# Altium PCB InactivityTracker.PcbDoc
Units mil, origin at the board's own origin, x right, y up, seen from the top; angles counter-clockwise.
Board outline 930 x 1725 mil, 2 copper layers (Top Layer, Bottom Layer); 67 components, 49 nets, 265 pads, 64 vias.
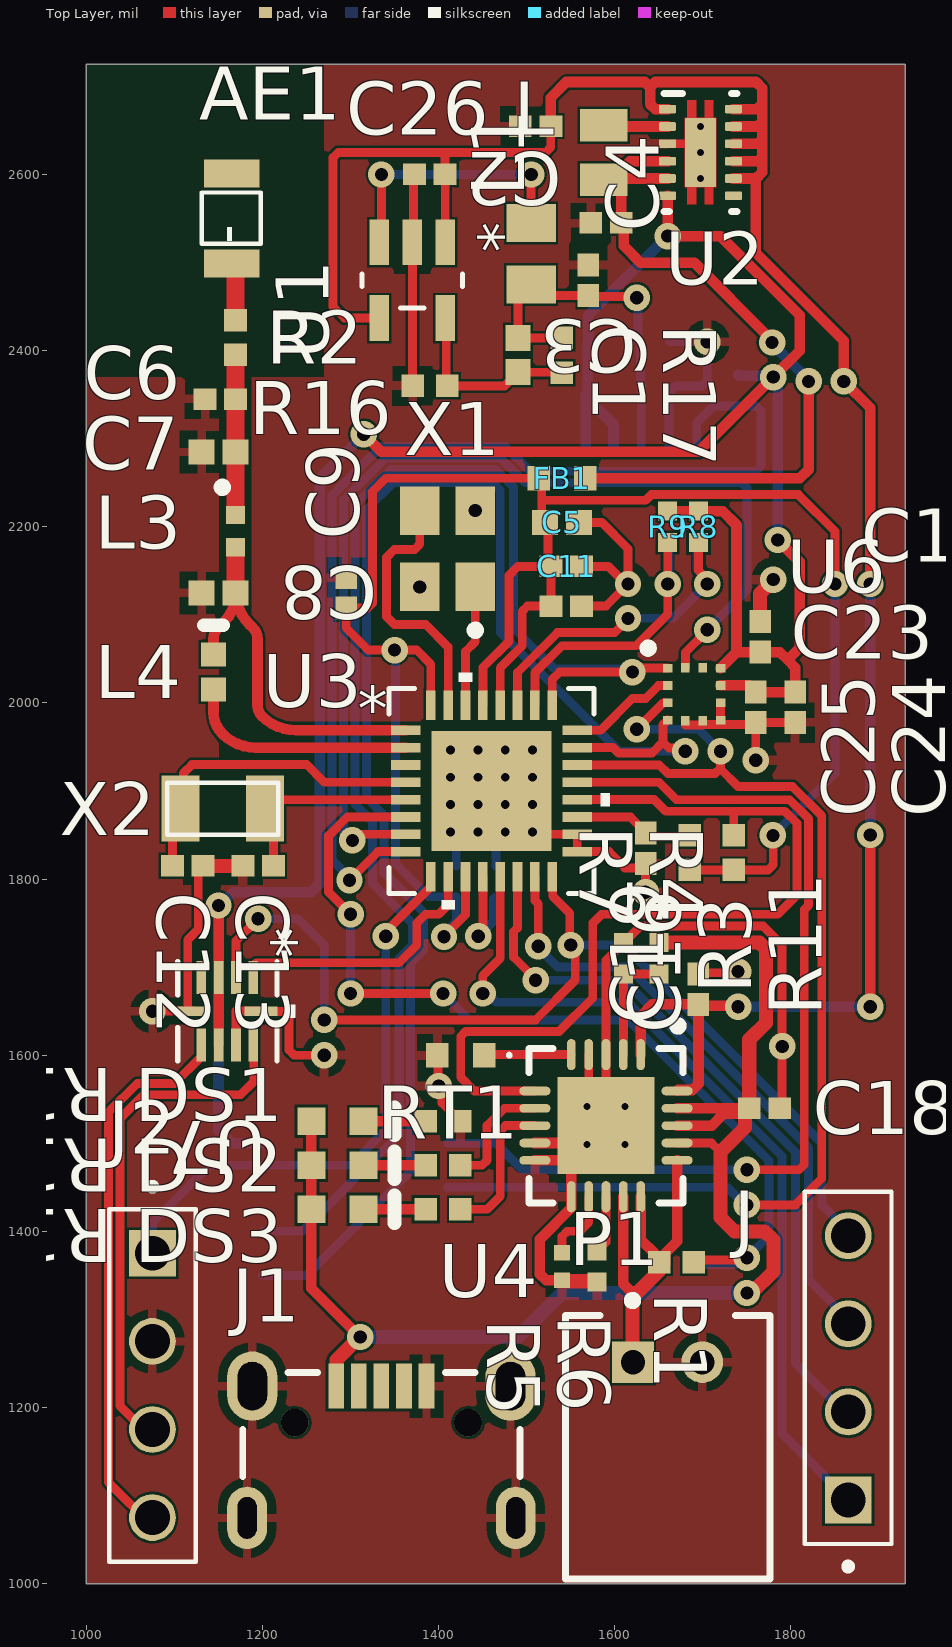
[diagram p0: Top Layer view]
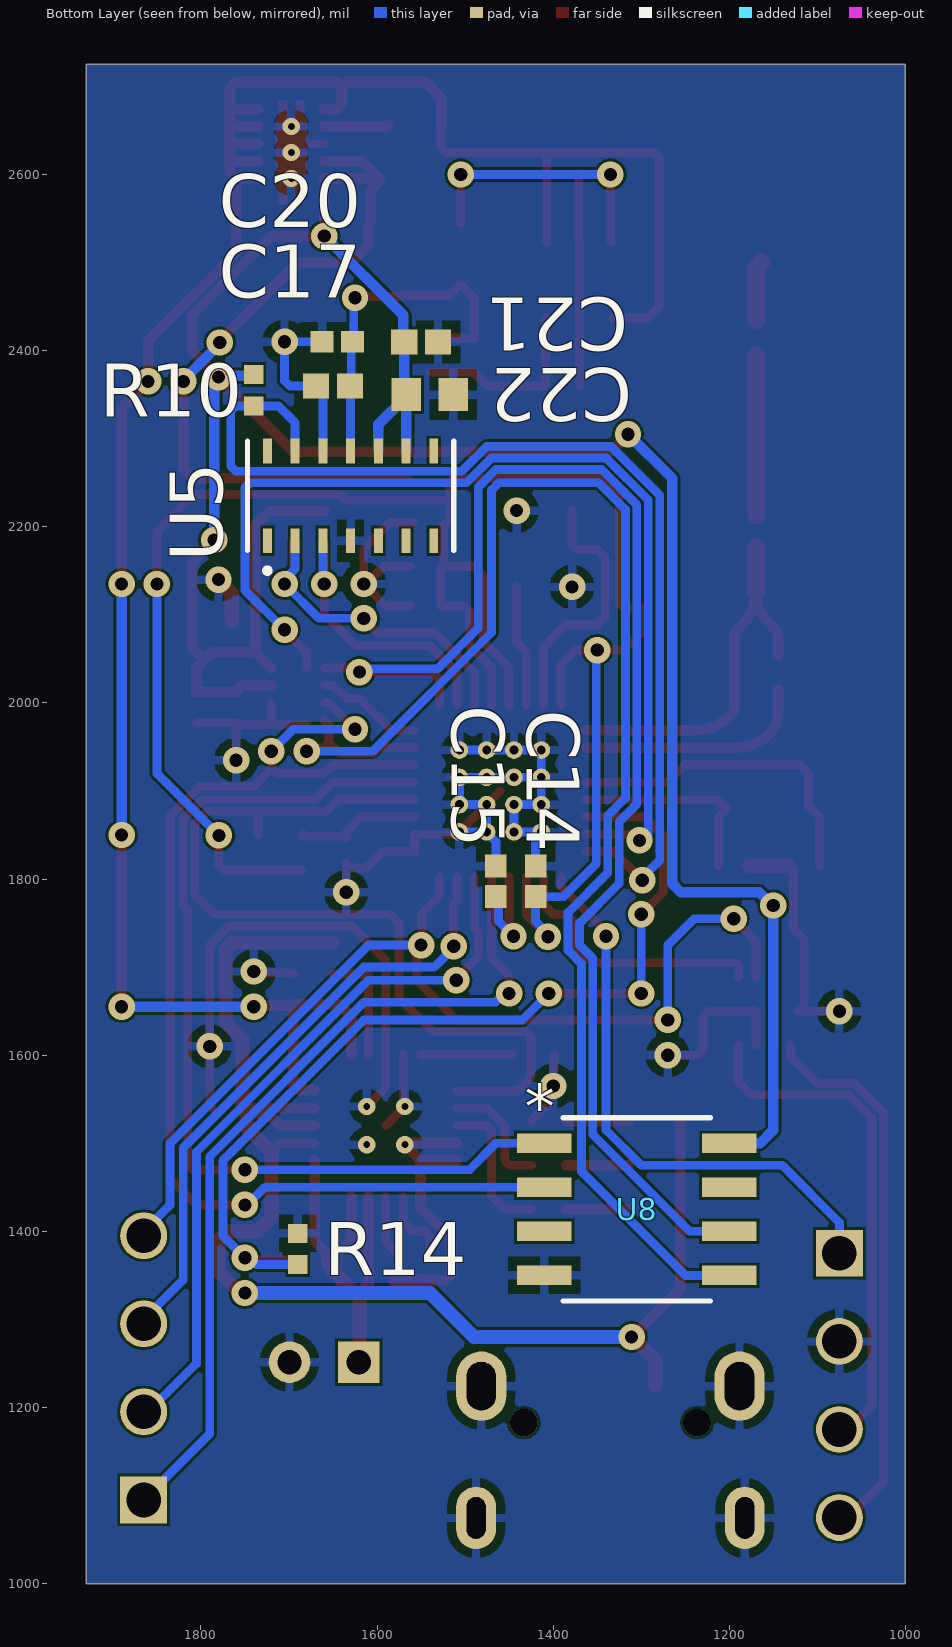
[diagram p1: Bottom Layer view, seen from below]

## Layer stack, top to bottom
Top Solder: solder mask 0.4, Solder Resist, Dk 3.5
Top Layer: signal copper 1.4
Dielectric 1: dielectric 12.6, FR-4, Dk 4.8
Bottom Layer: signal copper 1.4
Bottom Solder: solder mask 0.4, Solder Resist, Dk 3.5

## Board outline
1000,1000 1930,1000 1930,2725 1000,2725

## Design rules (kind name [scope] priority, off if disabled: settings)
Clearance [All] p1: gap=3 ignorepadtopadclearanceinfootprint=TRUE
PolygonConnect [All] p1: connectstyle=Relief reliefconductorwidth=10 reliefentries=4 polygonreliefangle="90 Angle" airgapwidth=10
RoutingVias [All] p1: holewidth=15 width=30 viastyle="Through Hole" minholewidth=5 minwidth=8 maxholewidth=28 maxwidth=50
SolderMaskExpansion [All] p1: expansion=4 istentingtop=FALSE
Width [All] p1: maxlimit=20 minlimit=3 preferedwidth=10
30 further rules are at their usual default settings.

## Classes and differential pairs
component class memory: U8

## Components (designator, comment, footprint, x,y, rotation, side; value= is the part's Value field where it differs from the comment)
AE1 "2450AT18B100E" ANT_2450AT18B100E 1165,2550 r90 top
C1 "100pF" CAPC1005X55X25ML05T10 1490,2395 r90 top
C2 "10uF" CAPC1005X55X25NL05T10 1510,2655 r180 top
C3 "10uF" CAPC1005X55X25NL05T10 1590,2545 r180 top
C4 "10uF" CAPC1005X55X25NL05T10 1570,2480 r90 top
C5 "2.2uF" CAPC1005X55X25ML05T10 1540,2205 r0 top
C6 "12pF" CAPC1005X55X25NL05T10 1152,2345 r180 top
C7 "1.2pF" CAPC1005X55X25ML05T10 1150,2285 r0 top
C8 "1.2pF" CAPC1005X55X25ML05T10 1150,2125 r0 top
C9 "100nF" CAPC1005X55X25NL05T10 1295,2125 r90 top
C10 "100nF" CAPC1005X55X25NL05T10 1545,2110 r180 top
C11 "100nF" CAPC1005X55X25NL05T10 1545,2155 r180 top
C12 "12pF" CAPC1005X55X25NL05T10 1115,1815 r180 top
C13 "12pF" CAPC1005X55X25NL05T10 1195,1815 r0 top
C14 "100nF" CAPC1005X55X25NL05T10 1420,1797.32 r270 bottom
C15 "1uF" CAPC1005X55X25NL5T10 1465,1797.32 r90 bottom
C16 "100nF" CAPC1005X55X25NL05T10 1635,1835 r90 top
C17 "0.1uF" CAPC1005X55X25ML05T10 1650,2360 r0 bottom
C18 "10uF" CAPC1005X55X25NL05T10 1770,1540 r0 top
C19 "4.7uF" CAPC1005X55X25NL05T10 1695,1675 r90 top
C20 "4.7uF" CAPC1005X55X25NL05T10 1645,2410 r0 bottom
C21 "0.1uF" CAPC1005X55X25ML05T10 1550,2410 r180 bottom
C22 "10uF" CAPC1608X90X35NL10T15 1540,2350 r180 bottom
C23 "100nF" CAPC1005X55X25NL05T10 1765,2075 r270 top
C24 "10uF" CAPC1005X55X25NL05T10 1805,1995 r270 top
C25 "100nF" CAPC1005X55X25NL05T10 1760,1995 r90 top
C26 "4.7uF" CAPC1005X55X25NL05T10 1390,2600 r180 top
DS1 "GREEN" LITE-ON-LTST-C190GKT-2_V 1285,1525 r0 top
DS2 "GREEN" LITE-ON-LTST-C190GKT-2_V 1285,1475 r0 top
DS3 "YELLOW" LITE-ON-LTST-C190GKT-2_V 1285,1425 r0 top
FB1 "BLM18HE152SN1D" MURA-BLM18-RF-H4-CHIP-2_V 1540,2255 r0 top
J "1987374-4" TE_1987374-4 1865,1095 r90 top
J1 "629105150521" 629105150521 1335,1110 r0 top
J2 "1987374-4" TE_1987374-4 1075,1375 r270 top
L "3.3uH" INDC2012X100N 1505,2510 r270 top
L1 "2.2uH" MURA-IND0805_H_0.55_L 1587.28,2625 r270 top
L3 "2nH" MURA-IND0402_V 1169.29,2195 r90 top
L4 "15nH" INDC1005X55X25ML05T10_A 1144.29,2035 r270 top
P1 "S2B-PH-K-S(LF)(SN)" JST-S2B-PH-K-S_V 1660,1155 r0 top
R1 "100K" RESC1005X40X25ML05T05 1670,1365 r0 top
R2 "0R" RESC1005X40X25ML05T05 1169.29,2415 r90 top
R3 "100k" RESC1005X40X25ML05T05 1685,1830 r270 top
R4 "330k" RESC1005X40X25NL05T05 1650,1710 r270 top
R5 "47k" RESC1005X40X25LL05T05 1540,1360 r270 top
R6 "88.7k" RESC1005X40X25NL05T05 1580,1360 r90 top
R7 "110k" RESC1005X40X25NL05T05 1610,1710 r90 top
R8 "1K" RESC1005X40X25NL05T05 1695,2200 r90 top
R9 "1K" RESC1005X40X25NL05T05 1660,2200 r90 top
R10 "1K" RESC1005X40X25NL05T05 1740,2355 r270 bottom
R11 "100k" RESC1005X40X25ML05T05 1735,1830 r270 top
R12 "470" RESC1005X40X25ML05T05 1405,1475 r0 top
R13 "470" RESC1005X40X25ML05T05 1405,1425 r0 top
R14 "249K" RESC1005X40X25NL05T05 1690,1380 r90 bottom
R15 "470" RESC1005X40X25ML05T05 1405,1525 r0 top
R16 "100k" RESC1005X40X25ML05T05 1390,2360 r0 top
R17 "200k" RESC1005X40X25ML05T05 1540,2394.68 r90 top
RT1 "10k" MURA-NCP18XH103F03RB-2_V 1425,1600 r180 top
U1 "SP6669AEK-L/TRR3" SOT-23-5_VAR-AA 1370,2480 r270 top value=Value
U2 "TPS62740DSSR" DSS0012A_V 1697.28,2625 r0 top
U3 "CC2640F128RHBT" RHB32_3P45X3P45 1460,1900 r0 top value=Value
U4 "MCP73871-2CCI/ML" QFN-ML20_M 1590,1520 r270 top
U5 "MAX30102EFD+" 21-0880B-L 1630,2235 r90 bottom
U6 "LIS2HH12TR" STM-LGA-12 1690,2010 r0 top
U7 "DRV2603RUNR" RUN10 1160,1650 r270 top value=Value
U8 "MX25R3235FM1IL0" SOP_8L_150 1305,1425 r180 bottom value=Value
X1 "24.0000Mhz" EPSON-TSX-3225_V 1410,2175 r90 top
X2 "32.768kHz" XTAL320X150X75 1155,1880 r0 top

## Footprints (in the part's own frame and the unit in brackets; to place one, negate y for a bottom-side part, rotate by r counter-clockwise, add the part's x,y. Pads: shape width x height; smd on the part's side, far side on the other; paste and mask are expansions set on the pad)
21-0880B-L [mil]
  rect 28x10 smd paste+0 mask+0: 1(-51,94.49) 2(-51,62.99) 3(-51,31.5) 4(-51,0) 5(-51,-31.5) 6(-51,-62.99) 7(-51,-94.49) 8(51,-94.49) 9(51,-62.99) 10(51,-31.5) 11(51,0) 12(51,31.5) 13(51,62.99) 14(51,94.49)
  silkscreen extent -88,-117 62,117, body extent -57,-112 57,112, height 51
629105150521 [mm] "Micro USB 2.0 SMT Type B Horizontal 5 Contacts High Current"
  rect 0.45x1.3 smd: 1(-1.3,2.9) 2(-0.65,2.9) 3(0,2.9) 4(0.65,2.9) 5(1.3,2.9)
  round 0.8 hole 0.8 unplated: MH1(-2.5,1.85) MH2(2.5,1.85)
  oval 1.15x1.8 hole 0.55 slot 1.2 at 90 deg: Shell(-3.875,-0.9) Shell(3.875,-0.9)
  oval 1.45x2 hole 0.85 slot 1.4 at 90 deg: Shell(-3.725,2.9) Shell(3.725,2.9)
  silkscreen extent -4,0.3 4,3.3, body extent -4,-3.3 4,3.3, height 2.75
ANT_2450AT18B100E [mm]
  rect 0.8x1.6 smd: 1(-1.3,0) 2(1.3,0)
  silkscreen extent -0.73,-0.84 0.75,0.86, body extent -1.6,-0.7 1.6,0.7, height 0.8
CAPC1005X55X25ML05T10 [mm] "Chip Capacitor, 2-Leads, Body 1.00x0.50mm, IPC Low Density"
  rect 0.76x0.72 smd: 1(-0.49,0) 2(0.49,0)
  body extent -0.53,-0.28 0.53,0.27, height 0.55
CAPC1005X55X25NL05T10 [mm] "Chip Capacitor, 2-Leads, Body 1.00x0.50mm, IPC Medium Density"
  rect 0.66x0.62 smd: 1(-0.44,0) 2(0.44,0)
  body extent -0.53,-0.28 0.53,0.27, height 0.55
CAPC1005X55X25NL5T10 [mm] "Chip Capacitor, 2-Leads, Body 1.05x0.55mm, IPC Medium Density"
  rect 0.66x0.62 smd: 1(-0.44,0) 2(0.44,0)
  body extent -0.52,-0.28 0.53,0.27, height 0.55
CAPC1608X90X35NL10T15 [mm] "Chip Capacitor, 2-Leads, Body 1.60x0.80mm, IPC Medium Density"
  rect 0.85x0.95 smd: 1(-0.675,0) 2(0.675,0)
  body extent -0.85,-0.45 0.85,0.45, height 0.9
DSS0012A_V [mm] "SON, 12-Leads, Body 2x3mm, Pitch 0.5mm, Thermal Pad 2x0.9mm, TI Recommended"
  rrect40% 0.5x0.25 smd: 1(-0.95,1.25) 2(-0.95,0.75) 3(-0.95,0.25) 4(-0.95,-0.25) 5(-0.95,-0.75) 6(-0.95,-1.25) 7(0.95,-1.25) 8(0.95,-0.75) 9(0.95,-0.25) 10(0.95,0.25) 11(0.95,0.75) 12(0.95,1.25)
  rrect11% 0.9x2 smd paste-0.45: 13(0,0)
  Top Layer region: -0.375,-1.5 -0.375,-1 -0.45,-1 -0.45,1 -0.375,1 -0.375,1.5 -0.125,1.5 -0.125,1 0.125,1 0.125,1.5 0.375,1.5 0.375,1 0.45,1 0.45,-1 0.375,-1 0.375,-1.5 0.125,-1.5 0.125,-1 -0.125,-1 -0.125,-1.5
  silkscreen extent -1.05,-1.7 1.05,1.7, body extent -1,-1.5 1,1.5, height 0.8
EPSON-TSX-3225_V [mm] "SMD, 4-Leads, Body 3.2x2.5mm"
  rect 1.4x1.15 smd: 1(-1.1,-0.8) 2(1.1,-0.8) 3(1.1,0.8) 4(-1.1,0.8)
  silkscreen extent -2.47,-0.93 -2.23,-0.68, body extent -1.6,-1.25 1.6,1.25, height 0.6
INDC1005X55X25ML05T10_A [mm] "Chip Inductor, 2-Leads, Body 1.05x0.55mm, IPC Low Density"
  rect 0.69x0.72 smd: 1(-0.505,0) 2(0.505,0)
  silkscreen extent -1.35,-0.28 -1.35,0.28, body extent -0.52,-0.28 0.53,0.28, height 0.55
INDC2012X100N [mm]
  rect 1.1x1.42 smd: 1(-0.885,0) 2(0.885,0)
JST-S2B-PH-K-S_V [mm] "THD, 2-Leads, Body 7.6x5.9mm, Pitch 2mm"
  rect 1.2x1.2 hole 0.7: 1(-1,2.45)
  round 1.2 hole 0.7: 2(1,2.45)
  silkscreen extent -2.95,-3.8 2.95,4.35, body extent -2.95,-3.8 2.95,3.8, height 4.8
LITE-ON-LTST-C190GKT-2_V [mm] "Chip, 2-Leads, Body 1.6x0.8mm"
  rect 0.8x0.8 smd: 1(-0.75,0) 2(0.75,0)
  silkscreen extent 1.65,-0.4 1.65,0.4, body extent -0.8,-0.4 0.8,0.4, height 0.8
MURA-BLM18-RF-H4-CHIP-2_V [mm] "Chip Ferrite Bead, 2-Leads, Body 1.6x0.8mm, Height 0.95mm, Reflow"
  rect 0.65x0.7 smd: 1(-0.675,0) 2(0.675,0)
  body extent -0.8,-0.4 0.8,0.4, height 0.95
MURA-IND0402_V [mm] "SMT Inductor, 2 Leads, Body 1x0.5 mm"
  rect 0.525x0.55 smd: 1(0.463,0) 2(-0.462,0)
  silkscreen extent 1.14,0.26 1.39,0.51, body extent -0.5,-0.25 0.5,0.25, height 0.55
MURA-IND0805_H_0.55_L [mm] "Chip Inductor, 2-Leads, Body 2.2x1.45mm, IPC High Density"
  rect 0.93x1.37 smd: 1(-0.785,0) 2(0.785,0)
  body extent -1.1,-0.72 1.1,0.72, height 0.55
MURA-NCP18XH103F03RB-2_V [mm] "Chip, 2-Leads, Body 1.6x0.8mm"
  rect 0.65x0.7 smd: 1(-0.675,0) 2(0.675,0)
  silkscreen extent -1.45,-0.05 -1.35,0.05, body extent -0.8,-0.4 0.8,0.4, height 0.8
QFN-ML20_M [mm] "QFN, 20-Leads, Body 4x4mm, Pitch 0.5mm, Thermal Pad 2.8x2.8mm, IPC Low Density"
  oval 0.9x0.25 smd: 1(-2.05,1) 2(-2.05,0.5) 3(-2.05,0) 4(-2.05,-0.5) 5(-2.05,-1) 11(2.05,-1) 12(2.05,-0.5) 13(2.05,0) 14(2.05,0.5) 15(2.05,1)
  oval 0.25x0.9 smd: 6(-1,-2.05) 7(-0.5,-2.05) 8(0,-2.05) 9(0.5,-2.05) 10(1,-2.05) 16(1,2.05) 17(0.5,2.05) 18(0,2.05) 19(-0.5,2.05) 20(-1,2.05)
  rect 2.8x2.8 smd: 21(0,0)
  silkscreen extent -3,-2.22 2.23,2.23, body extent -2.07,-2.07 2.08,2.08, height 1
RESC1005X40X25LL05T05 [mm] "Chip Resistor, 2-Leads, Body 1.00x0.50mm, IPC High Density"
  rect 0.45x0.45 smd: 1(-0.4,0) 2(0.4,0)
  body extent -0.53,-0.27 0.53,0.28, height 0.4
RESC1005X40X25ML05T05 [mm] "Chip Resistor, 2-Leads, Body 1.05x0.55mm, IPC Low Density"
  rect 0.65x0.65 smd: 1(-0.5,0) 2(0.5,0)
  body extent -0.53,-0.28 0.53,0.28, height 0.4
RESC1005X40X25NL05T05 [mm] "Chip Resistor, 2-Leads, Body 1.00x0.50mm, IPC Medium Density"
  rect 0.55x0.55 smd: 1(-0.45,0) 2(0.45,0)
  body extent -0.53,-0.27 0.53,0.28, height 0.4
RHB32_3P45X3P45 [mm]
  rect 0.85x0.28 smd paste-0.14 mask+0: 1(-2.475,1.75) 2(-2.475,1.25) 3(-2.475,0.75) 4(-2.475,0.25) 5(-2.475,-0.25) 6(-2.475,-0.75) 7(-2.475,-1.25) 8(-2.475,-1.75) 17(2.475,-1.75) 18(2.475,-1.25) 19(2.475,-0.75) 20(2.475,-0.25) 21(2.475,0.25) 22(2.475,0.75) 23(2.475,1.25) 24(2.475,1.75)
  rect 0.28x0.85 smd paste-0.14 mask+0: 9(-1.75,-2.475) 10(-1.25,-2.475) 11(-0.75,-2.475) 12(-0.25,-2.475) 13(0.25,-2.475) 14(0.75,-2.475) 15(1.25,-2.475) 16(1.75,-2.475) 25(1.75,2.475) 26(1.25,2.475) 27(0.75,2.475) 28(0.25,2.475) 29(-0.25,2.475) 30(-0.75,2.475) 31(-1.25,2.475) 32(-1.75,2.475)
  rect 3.45x3.45 smd paste-1.712 mask-1.714: 33(0,0)
  round 0.508 hole 0.254: V(-1.181,-1.181) V(-1.181,-0.394) V(-1.181,0.394) V(-1.181,1.181) V(-0.394,-1.181) V(-0.394,-0.394) V(-0.394,0.394) V(-0.394,1.181) V(0.394,-1.181) V(0.394,-0.394) V(0.394,0.394) V(0.394,1.181) V(1.181,-1.181) V(1.181,-0.394) V(1.181,0.394) V(1.181,1.181)
  silkscreen extent -2.96,-3.41 3.41,3.41, body extent -2.63,-2.63 2.63,2.63, height 1.4
RUN10 [mm]
  rect 0.95x0.28 smd paste-0.14: 1(-0.975,0.75) 2(-0.975,0.25) 3(-0.975,-0.25) 4(-0.975,-0.75) 6(0.975,-0.75) 7(0.975,-0.25) 8(0.975,0.25) 9(0.975,0.75)
  rect 0.28x0.95 smd paste-0.14: 5(0,-0.975) 10(0,0.975)
  silkscreen extent -1.43,-1.43 1.43,1.96, body extent -1.1,-1.1 1.1,1.1, height 0.6
SOP_8L_150 [mil]
  rect 62x22 smd paste+0 mask+0: 1(-105,75) 2(-105,25) 3(-105,-25) 4(-105,-75) 5(105,-75) 6(105,-25) 7(105,25) 8(105,75)
  silkscreen extent -84,-104 84,104, body extent 0,0 10,10, height 10
SOT-23-5_VAR-AA [mil]
  rect 52x22 smd mask+0: 1(-43,37.4) 2(-43,0) 3(-43,-37.4) 4(43,-37.4) 5(43,37.4)
  silkscreen extent -7,-57 32,57, body extent 0,0 10,10, height 10
STM-LGA-12 [mm] "LGA, 12-Leads, Body 2x2mm, Pitch 0.5mm"
  rect 0.275x0.25 smd: 1(-0.763,0.75) 2(-0.763,0.25) 3(-0.763,-0.25) 4(-0.763,-0.75) 7(0.763,-0.75) 8(0.763,-0.25) 9(0.763,0.25) 10(0.763,0.75)
  rect 0.25x0.275 smd: 5(-0.25,-0.762) 6(0.25,-0.762) 11(0.25,0.763) 12(-0.25,0.763)
  silkscreen extent -1.45,1.2 -1.2,1.45, body extent -1,-1 1,1, height 1
TE_1987374-4 [mm]
  rect 1.35x1.35 hole 1: 1(0,0)
  round 1.35 hole 1: 2(2.54,0) 3(5.08,0) 4(7.62,0)
  silkscreen extent -2.02,-1.25 8.89,1.25
XTAL320X150X75 [mil]
  rect 43x75 smd: 1(-48,0) 2(48,0)
  silkscreen extent -63,-30 63,30

## Part data
AE1: "JOHANSON TECHNOLOGY - 2450AT18B100E - ANTENNA, CERAMIC, 2.45GHZ", Case/Package=CSMD, Frequency=2.45GHz, Manufacturer=Johanson, Max Frequency=2.5GHz, Max Operating Temperature=85°C, Max Power Dissipation=3W, Min Operating Temperature=-40°C, Package Quantity=1, Supplier Part Number 1=712-1006-1-ND, Bandwidth=100MHz, Category="RF Antennas", ComponentLink1Description=https://datasheet.ciiva.com/24025/antenna-2450at18b100-242422-24025839.pdf?src-supplier=Mouser, ComponentLink1URL=https://datasheet.ciiva.com/24025/antenna-2450at18b100-242422-24025839.pdf?src-supplier=Mouser, ComponentLink2Description=https://datasheet.ciiva.com/1124/1318299-1124918.pdf?src-supplier=Element14, ComponentLink2URL=https://datasheet.ciiva.com/1124/1318299-1124918.pdf?src-supplier=Element14, Contact Plating=Tin, Gain=-0.5dB, Height=0.051inch, Impedance=50R, Length=3.2mm, Manufacturer Part Number=2450AT18B100E, Mount="Surface Mount", Number of Bands=1, Packaging="Tape and Reel", Power Rating=3W, Pricing 1="1=0.56000, 10=0.49500, 25=0.46520, 100=0.37950, 250=0.35252, 500=0.30000, 1000=0.24000 (USD)", Radiation Hardening=No, REACH SVHC="No SVHC", Return Loss=-9.5dB, RoHS=Yes, Stock 1=218439, Supplier 1=Digi-Key, Termination=Solder, Width=1.6mm
C1: library part CMP-2008-04249-1, Manufacturer=Murata, Part Number=GRM1555C1H101GA01D
C2 C3 C4 C18 C24: library part CMP-2008-04556-1, Manufacturer=Murata, Part Number=GRM155R61A105KE15D
C5: library part CMP-2008-04543-1, Manufacturer=Murata, Part Number=GRM155R60J225ME15D
C6 C12 C13: library part CMP-2008-04258-1, Manufacturer=Murata, Part Number=GRM1555C1H120JA01D
C7 C8: library part CMP-2008-04281-1, Manufacturer=Murata, Part Number=GRM1555C1H1R2CA01D
C9 C10 C11 C14 C16 C23 C25: library part CMP-2008-04639-1, Manufacturer=Murata, Part Number=GRM155R71H104KE14D
C15: library part CMP-1662-00020-1, "Chip Capacitor, 1 uF, +/- 10%, 6.3 V, -55 to 85 degC, 0402 (1005 Metric), RoHS, Tape and Reel", Capacitance="1 uF", Case Code (Imperial)=0402, Case Code (Metric)=1005, Max Operating Temperature="85 degC", Min Operating Temperature="-55 degC", Package Quantity=10000, PartNumber=GRM155R60J105KE19D, Tolerance=10%, Type (Capacitors)=X5R, Voltage Rating="6.3 V", Voltage Rating (DC)="3 V", Case/Package=0402, ComponentLink1Description="Manufacturer URL", ComponentLink1URL=http://www.murata.com/, ComponentLink2Description=Datasheet, ComponentLink2URL=http://psearch.en.murata.com/capacitor/product/GRM155R60J105KE19%23.pdf, DatasheetVersion=08/2016, Height="0.5 mm", Length="1 mm", Mount="Surface Mount", Mounting Technology="Surface Mount", PackageDescription="2-Pin Surface Mount Device, Body 1 x 0.5 mm", Packaging="Tape and Reel", Pins=2, Radiation Hardening=No, REACH SVHC="No SVHC", RoHSCompliant=true, Width="0.5 mm"
C17 C21: library part CMP-2100-03641-1, "Chip Capacitor, 0.1 uF, +/- 10%, 16 V, -55 to 125 degC, 0402 (1005 Metric), RoHS, Tape and Reel", Capacitance=100nF, Case Code (Imperial)=0402, Case Code (Metric)=1005, Dielectric=X7R, Dielectric Material=Ceramic, Insulation Resistance=10GR, Manufacturer=Murata, Max Operating Temperature=125degC, Min Operating Temperature=-55degC, Package Description="2-Pin Surface Mount Device, Body 1 x 0.5 mm", Package Quantity=1, Tolerance=10%, Voltage=16V, Case/Package=0402, Datasheet URL=http://psearch.en.murata.com/capacitor/product/GRM155R71C104KA88%23.pdf, Datasheet Version=42675.0, Depth=0.5mm, Height=0.5mm, Lead Free=LeadFree, Length=1mm, Manufacturer URL=http://www.murata.com/, Material=Ceramic, Mount=SurfaceMount, Number of Pins=2, Package Reference=0402, Packaging=TapeandReel, Radiation Hardening=No, REACH SVHC=NoSVHC, RoHSCompliant=true, Termination=SMD/SMT, Thickness=0.022inch, Voltage Rating=16V, Voltage Rating (DC)=16V, Width=0.5mm
C19 C26: library part CMP-2008-03967-1, Manufacturer=Murata, Part Number=GRM155R61C102KA01D
C20: library part CMP-2008-04549-1, Manufacturer=Murata, Part Number=GRM155R60J475ME47D
C22: library part CMP-2006-02792-1, Manufacturer=Murata, Part Number=GRM188R60J106ME47D
DS1 DS2 DS3: library part CMP-2000-05197-1, "LED Uni-Color Green, 75 mW, 5 V, -30 to 85 degC, 2-Pin SMD, RoHS, Tape and Reel", Emitting Color=YellowGreen, Forward Current=30mA, Forward Voltage=2.4V, Manufacturer=Lite-On, Operating Temp Range=-55Cto85C, Operating Temperature Classification=Industrial, Package Description="2-Pin Surface Mount Device, Body 1.6 x 0.8 mm", Package Reference=C190KGKT, Package Type=ChipLed, Power Dissipation=75W, Reverse Voltage=5V, Test Current (It)=20mA, Chip Material=AlGaInP, Datasheet URL=http://datasheet.octopart.com/LTST-C190KGKT-Lite-On-datasheet-43775815.pdf, Datasheet Version=Jul-15, DELETED=Compliant, Dominant Wave Length=571nm, High Brightness=Yes, Lens Dimensions=1.1X0.8X0.52mm, Lum Intensity=35mcd, Luminous Intensity=35mcd, Main Category=ChipLED, Manufacturer URL=http://www.us.liteon.com/, Mounting=SurfaceMount, Number of Elements=1, Packaging=TapeandReel, Peak Wavelength=574nm, Pin Count=2, Product Depth (mm)=0.8mm, Product Height (mm)=0.8mm, Product Length (mm)=1.6mm, Rad Hardened=No, Shape Type=Rectangular, Type=Uni-Color, Viewing Angle=130deg
FB1: library part CMP-0686-00368-2, "Chip Ferrite Bead for GHz Band High-speed Signal Lines, 1500 Ohm, 500 mA, -55 to 125 degC, 1.6 x 0.8 x 0.95 mm SMD, Tape and Reel", DC Resistance="0.50 Ohm Max.", Manufacturer=Murata, Operating Temperature Range="-55 to 125 degC", Rated Current="500 mA", ComponentLink1Description="Manufacturer URL", ComponentLink1URL=http://www.murata.com/, ComponentLink2Description=Datasheet, ComponentLink2URL=http://www.murata.com/products/catalog/pdf/c31e.pdf, ComponentLink3Description="Package Specification", ComponentLink3URL=http://www.murata.com/products/catalog/pdf/c31e.pdf, DatasheetVersion=08/2013, Impedance (at 100 MHz)="1500 Ohm +/- 25%", Mounting Technology="Surface Mount", PackageDescription="2-Pin Chip, Body 1.6 x 0.8 mm", PackageReference=BLM18_H950-2, Packing="Tape and Reel", PartNumber=BLM18HE152SN1D
J J2: "Pin Connector AMPMODU II PIN HEADER SINGLE ROW 4 POS", Package=None, Availability=Unavailable, MF="TE Connectivity", MP=1987374-4, Price=None, SnapEDA_Link=https://www.snapeda.com/parts/1987374-4/TE%20Connectivity/view-part/3100872/?ref=snap, TE_purchase_URL=https://www.te.com/usa-en/product-1987374-4.html?te_bu=Cor&te_type=disp&te_campaign=seda_glo_cor-seda-global-disp-prtnr-fy19-seda-model-bom-cta_sma-317_1&elqCampaignId=32493
J1: library part CMP-1502-03252-1, "Micro USB 2.0 Type B Receptacle WR-COM, Horizontal, SMT, with Pegs, High Current at Pin 1 & Pin 5", Contact Resistance=30mOhm, Manufacturer="Wurth Elektronik", Operating Temperature=-40to85degC, Rated Current=3A, Working Voltage=30VAC, Connector Type=MicroUSB2.0TypeB, Datasheet URL=https://katalog.we-online.de/em/datasheet/629105150521.pdf, Gender=Receptacle, Manufacturer URL=http://www.we-online.de, Mounting Technology=SMT, Orientation=Horizontal, Package Reference=629105150521, Packaging=TapeandReel, Part Number=629105150521, Publisher=WurthElektronik
L: library part LQM21PN3R3NGRD, "Inductor with Inductance: 3.3uH Tol. +/-30%, Package: 0805 _2012_", Package="2012 Murata", Digi-Key_Part_Number=490-11718-1-ND, Digi-Key_Purchase_URL=https://www.digikey.com/product-detail/en/murata-electronics/LQM21PN3R3NGRD/490-11718-1-ND/5333558?utm_source=snapeda&utm_medium=aggregator&utm_campaign=symbol, MF=Murata, MP=LQM21PN3R3NGRD, SnapEDA_Link=https://www.snapeda.com/parts/LQM21PN3R3NGRD/Murata%20Electronics%20North%20America/view-part/1523369/?ref=snap
L1: library part CMP-2000-06589-1, "Chip Inductor, 1.0 uH, +/- 20%, -55 to 125 degC, 2-Pin SMD (0805), RoHS, Tape and Reel", Case Size/Dimension=0805, DC Resistance=0.19, Inductance-Nom=1H, Manufacturer=Murata, Package Description="2-Pin Surface Mounted Device, Body 2 x 1.25 mm", Rated Current-Max=800mA, Tolerance (%)=20%, Datasheet URL=https://datasheet.ciiva.com/3866/336lqm21pn1r0mc023-3866307.pdf, Datasheet Version=07/2014, Manufacturer URL=http://www.murata.com/, Mounting Technology=SurfaceMount, Package Reference=0805
L3: library part CMP-0499-00001-3, "Chip Inductor (Chip Coil) for High Frequency Multilayer, 2 +/- 0.3 nH, 300 mA, 0402 (1005), 180mm Paper Tape", Inductance="2.0 nH +/- 0.3 nH", Inductance Test Frequency="100 MHz", Manufacturer=Murata, Max. Of DC Resistance="0.1 ohm", Operating Temperature Range="-55 to 125 degC", PartNumber=LQG15HS2N0S02D, Rated Current (Itemp) (Based on Temperature rise)="300 mA", Self Resonance Frequency (min.)="6000 MHz", ComponentLink1Description="Manufacturer URL", ComponentLink1URL=http://www.murata.com/, ComponentLink2Description=Datasheet, ComponentLink2URL=http://search.murata.co.jp/Ceramy/image/img/PDF/ENG/L0075S0083LQG15HS.pdf, ComponentLink3Description="Package Specification", ComponentLink3URL=http://search.murata.co.jp/Ceramy/image/img/PDF/ENG/L0075S0083LQG15HS.pdf, Mounting Technology="Surface Mount", PackageDescription="2-Pin SMT Inductor, 1 x 0.5 mm Body", PackageReference=IND0402, Q (min.)=8, Q Test Frequency="100 MHz", RoHS=Yes
L4: library part CMP-2100-03652-1, "Chip Inductor, 15 nH, +/- 5%, 100 MHz, -55 to 125 degC, 0402 (1005 Metric), RoHS, Paper Tape", Case Code (Imperial)=0402, Case Code (Metric)=1005, Current Rating=300mA, DC Resistance (DCR)=320mOhm, Inductance=15nh, Manufacturer=Murata, Max Operating Temperature=125degC, Min Operating Temperature=-55degC, Package Description="2-Pin Surface Mount Device, Body 1 x 0.5 mm", Package Quantity=10000, Self Resonant Frequency=2.5GHz, Test Frequency=100MHz, Tolerance=5%, Case/Package=0402, Core Material=Air, Datasheet URL=http://psearch.en.murata.com/inductor/product/LQG15HS15NJ02_.pdf, Datasheet Version=42675.0, DC Current=300mA, Depth=0.55mm, Height=0.5mm, Height - Seated (Max)=0.022inch, Lead Free=LeadFree, Length=1mm, Manufacturer URL=http://www.murata.com/, Max DC Current=300mA, Military Standard=Not, Package Reference=0402, Packaging=TapeandReel, Q Factor=8, Radiation Hardening=No, RoHSCompliant=true, Shielding=Unshielded, Termination=SMD/SMT, Width=0.02inch
P1: library part CMP-1755-00004-1, "Male Header, Pitch 2 mm, 1 x 2 Position, Height 4.8 mm, Tail Length 3.4 mm, -25 to 85 degC, RoHS, Bulk", Capacitance="10 uF", Case\Package=Radial, Max Operating Temperature="85 degC", Min Operating Temperature="-40 degC", Package Quantity=200, Tolerance=20%, Voltage Rating="50 V", ComponentLink1Description=Datasheet, ComponentLink1URL=http://www.jst-mfg.com/product/pdf/eng/ePH.pdf, DatasheetVersion=Dec-12, Diameter="5 mm", Height="11 mm", Lead Pitch="2 mm", Length="11 mm", Mount="Through Hole", PackageDescription="Male Header, Pitch 2 mm, 1 x 2 Position, Height 4.8 mm, Tail Length 3.4 mm", PackageReference=S2B-PH-K-S, Packaging=Bulk, Pins=2, Radiation Hardening=No, REACH SVHC="No SVHC", RoHSCompliant=true, Voltage Rating (DC)="50 V"
R1 R3 R11 R16: library part CMP-2002-08123-2, "Chip Resistor, 100 KOhm, +/- 1%, 0.63 W, -55 to 155 degC, 0402 (1005 Metric), RoHS, Tape and Reel", Case Code (Imperial)=0402, Case Code (Metric)=1005, Max Operating Temperature="155 degC", Min Operating Temperature="-55 degC", Package Quantity=10000, Power Rating="63 mW", Resistance="100 kohm", Tolerance=1%, Type (Resistor)="Thick Film", Voltage Rating="50 V", Case\Package=0402, ComponentLink1Description="Manufacturer URL", ComponentLink1URL=http://www.vishay.com/, ComponentLink2Description=Datasheet, ComponentLink2URL=http://www.vishay.com/docs/20035/dcrcwe3.pdf, DatasheetVersion=06/2012, Height="0.35 mm", Length="1 mm", Mount="Surface Mount", Mounting Technology="Surface Mount", PackageDescription="2-Pin Surface Mount Device, Body 1 x 0.5 mm", PackageReference=0402, Packaging="Tape and Reel", Pins=2, Radiation Hardening=No, REACH SVHC=Unknown, RoHSCompliant=true, Weight="2.3E-05 oz", Width="0.5 mm"
R2: library part CMP-2002-08122-1, Manufacturer="Vishay Dale", Part Number=CRCW04020000Z0ED
R4: library part CMP-2002-08521-1, Manufacturer="Vishay Dale", Part Number=CRCW0402330KFKED
R5: library part CMP-2002-00026-1, Manufacturer="Vishay Dale", Part Number=CRCW040247K0JNED
R6: library part CMP-2002-00251-1, Manufacturer="Vishay Dale", Part Number=CRCW040288K7FKED
R7: library part CMP-2002-08148-1, Manufacturer="Vishay Dale", Part Number=CRCW0402110KFKED
R8 R9 R10: library part CMP-2002-08276-1, Manufacturer="Vishay Dale", Part Number=CRCW04021K00FKED
R12 R13 R15: library part CMP-2002-00023-1, Manufacturer="Vishay Dale", Part Number=CRCW0402470RJNED
R14: library part CMP-2002-08401-1, Manufacturer="Vishay Dale", Part Number=CRCW0402249KFKED
R17: library part CMP-2002-08351-1, Manufacturer="Vishay Dale", Part Number=CRCW0402200RFKED
RT1: library part CMP-2000-05271-1, "NTC Thermistor, 10 KOhm, +/- 1%, 0.1 W, -40 to 125 degC, 0603 (1608 Metric), RoHS, Tape and Reel", Manufacturer=Murata, Rated Current=310A, Resistance=10kO, Temperature Range=-40to+125degC, Tolerance (%)=±1%, B-constant=3434K, Datasheet URL=http://www.jameco.com/Jameco/Products/ProdDS/1870999.pdf, Datasheet Version=Apr-05, Manufacturer URL=http://www.murata.com/, Type=NTC
U1: "Buck Switching Regulator IC Positive Adjustable 0.6V 1 Output 600mA SC-74A, SOT-753", Built_By=EMA_Jessica, Copyright="Copyright (C) 2018 Accelerated Designs. All rights reserved", Manufacturer_Part_Number=SP6669AEK-L/TRR3, RefDes=RefDes, Type=DEV, Vendor=Exar
U2: library part CMP-0323-00572-2, "Step Down Converter For Low Power Applications, 2.2 to 5.5 V VIN, -40 to 85 degC, 12-Pin WSON (DSS), RoHS, Tape and Reel", PartNumber=TPS62740, Temperature Max="85 degC", Temperature Min="-40 degC", ComponentLink1Description="Manufacturer URL", ComponentLink1URL=http://www.ti.com/, ComponentLink2Description=Datasheet, ComponentLink2URL=http://www.ti.com/lit/ds/symlink/tps62740.pdf, ComponentLink3Description="Package Specification", ComponentLink3URL=http://www.ti.com/litv/pdf/mpds336b, DatasheetVersion=SLVSB02B, Mounting Technology="Surface Mount", PackageDescription="12-Pin Plastic Small Outline, Body 3 x 2 mm, Pitch 0.5 mm", PackageReference=DSS0012A, PackageVersion="4209244/C, 07/2011", Packing="Tape and Reel", RoHS=TRUE, VIN Max="5.5 V", VIN Min="2.2 V", VOUT Max="3.3 V", VOUT Min="1.8 V"
U3: "SimpleLink Wireless MCU", Built_By=EMA_Jessica, Copyright="Copyright (C) 2018 Accelerated Designs. All rights reserved", Manufacturer_Part_Number=CC2640F128RHBT, RefDes=RefDes, Type=DEV, Vendor="Texas Instruments"
U4: library part CMP-0133-00005-1, "Stand-Alone System Load Sharing and Li-Ion/Li-Polymer Battery Charge Management Controller, 4.2V, 20-Pin QFN, Industrial Temperature", DatasheetVersion="revB, May-2009", PackageDescription="20-Lead Plastic Quad Flat, No Lead Package (ML) - 4x4x0.9 mm Body [QFN]", PackageReference=QFN-ML20, PackageVersion="revBB, Aug-2009"
U5: "IC SENSOR OXIMETER/HEARTRATE", Manufacturer=Maxim, Max Operating Temperature=85°C, Max Supply Voltage=2V, Min Operating Temperature=-40°C, Min Supply Voltage=1.7V, Supplier Part Number 1=MAX30102EFD+-ND, Category="Decoders, Multiplexers", ComponentLink1Description=http://www.farnell.com/datasheets/2162814.pdf?src-supplier=Farnell, ComponentLink1URL=http://www.farnell.com/datasheets/2162814.pdf?src-supplier=Farnell, ComponentLink2Description=http://www.farnell.com/datasheets/2162814.pdf?src-supplier=Element14, ComponentLink2URL=http://www.farnell.com/datasheets/2162814.pdf?src-supplier=Element14, ComponentLink3Description=https://datasheets.maximintegrated.com/en/ds/MAX30102.pdf?src-supplier=Digi-Key, ComponentLink3URL=https://datasheets.maximintegrated.com/en/ds/MAX30102.pdf?src-supplier=Digi-Key, Manufacturer Part Number=MAX30102EFD+, Number of Pins=14, Pricing 1="1=9.76000, 10=8.81500, 25=8.40520, 100=7.29800, 500=6.35500, 1000=5.53500 (USD)", REACH SVHC="No SVHC", RoHS=Yes, Stock 1=798, Supplier 1=Digi-Key
U6: library part CMP-2000-07462-1, "MEMS Digital Output Motion Sensor: Ultra-Low-Power High-Performance 3-Axis \"Pico\" Accelerometer, 1.71 to 3.6 V, -40 to 85 degC, 12-Pin LGA, RoHS, Tape and Reel", Case\/Package=LGA, Manufacturer=STMicroelectronics, Max Operating Temperature=85degC, Min Operating Temperature=-40degC, Package Description="12-Pin Land Grid Array Package, Body 2 x 2 mm, Pitch 0.5 mm", Package Reference=LGA-12, Bandwidth=400Hz, Contact Plating=Gold, Datasheet URL=http://www.st.com/content/ccc/resource/technical/document/datasheet/c9/16/f2/79/ca/31/47/89/DM00096789.pdf/files/DM00096789.pdf/jcr:content/translations/en.DM00096789.pdf, Datasheet Version="Rev. 5, 12/2015", Lead Free=LeadFree, Manufacturer URL=http://www.st.com/, Mount=SurfaceMount, Mounting Technology=SurfaceMount, Number of Pins=12, Packaging=TapeandReel, RoHSCompliant=true
U7: "Motor Driver Power MOSFET Parallel, PWM 10-QFN (2x2)", Built_By=EMA_UL_Team, Copyright="Copyright (C) 2018 Accelerated Designs. All rights reserved", Manufacturer_Part_Number=DRV2603RUNR, RefDes=RefDes, Type=DEV, Vendor="Texas Instruments"
U8: "FLASH - NOR Memory IC 32Mb (4M x 8) SPI 80MHz 8-SOP", Built_By=EMA_Cory, Copyright="Copyright (C) 2018 Accelerated Designs. All rights reserved", Manufacturer_Part_Number=MX25R3235FM1IL0, RefDes=RefDes, Type=DEV, Vendor=Macronix
X1: library part CMP-2000-07333-1, "MHz Range Crystal, 24 MHz, -40 to 85 degC, 4-Pin SMD, RoHS, Tape and Reel", Frequency=24MHz, Frequency Stability=10PPM, Load Capacitance=9pF, Manufacturer=Epson, Operating Temperature Range=-40Cto+85C, Package / Case=3.2mmx2.5mm, Package Description="4-Pin Surface Mount Device, Body 3.2 x 2.5 mm", Package Reference=TSX-3225, =X1G004001001012, Brand=EpsonTiming, Datasheet URL=https://support.epson.biz/td/api/doc_check.php?dl=brief_FA-238V_en.pdf, Datasheet Version=12/2015, Drive Level=200uW, ESR=40Ohms, Factory Pack Quantity=250, Height=0.6mm, Length=3.2mm, Manufacturer URL=https://www.eea.epson.com/, Mounting Style=SMD/SMT, Mounting Technology=SurfaceMount, Packaging=Reel, Product Category=Crystals, RoHS=True, Series=TSX-3225, Termination Style=SMD/SMT, Tolerance=10PPM, Type=Crystal, Unit Weight=0.000564oz, Width=2.5mm
X2: library part 9HT10-32.768KDZY-T, "TXC - 9HT10-32.768KDZY-T - CRYSTAL, 32.768KHZ, 7PF, 3.2 X 1.5MM", Case/Package=SMD/SMT, ESR (Equivalent Series Resistance)=70kR, Frequency Tolerance=20ppm, Load Capacitance=7pF, Manufacturer=TXC, Max Operating Temperature=85°C, Min Operating Temperature=-40°C, Package Quantity=1, Supplier Part Number 1=887-1506-1-ND, Category=Crystals, ComponentLink1Description=https://datasheet.ciiva.com/856/9ht10-856052.pdf?src-supplier=Digi-Key, ComponentLink1URL=https://datasheet.ciiva.com/856/9ht10-856052.pdf?src-supplier=Digi-Key, ComponentLink2Description=https://datasheet.ciiva.com/856/9ht10-856053.pdf?src-supplier=Digi-Key, ComponentLink2URL=https://datasheet.ciiva.com/856/9ht10-856053.pdf?src-supplier=Digi-Key, ComponentLink3Description=https://datasheet.ciiva.com/8047/9ht10-8047909.pdf?src-supplier=Element14, ComponentLink3URL=https://datasheet.ciiva.com/8047/9ht10-8047909.pdf?src-supplier=Element14, ComponentLink4Description=https://datasheet.ciiva.com/856/9ht10-856054.pdf?src-supplier=Digi-Key, ComponentLink4URL=https://datasheet.ciiva.com/856/9ht10-856054.pdf?src-supplier=Digi-Key, Frequency=32.768kHz, Height=0.033inch, Lead Free="Lead Free", Length=0.126inch, Manufacturer Part Number=9HT10-32.768KDZY-T, Mount="Surface Mount", Number of Pins=2, Packaging="Tape and Reel", Pricing 1="1=0.66000, 10=0.55000, 50=0.49500, 100=0.44000, 500=0.41800, 1000=0.35200 (USD)", REACH SVHC="No SVHC", RoHS=Yes, Stock 1=3909, Supplier 1=Digi-Key, Termination=SMD/SMT, Tolerance=20ppm, Width=1.5mm

## Via types
v1: diameter 30, hole 15, Top Layer to Bottom Layer, 57 vias
v2: diameter 19.68, hole 7.87, Top Layer to Bottom Layer, 7 vias

## Nets (pads, with @x,y where several pads share a name; then routed paths per layer and width w, separated by ;. In a path a pad name is that pad's centre, name@x,y a point inside that pad or via, vN(x,y) a via of type N, cw(c..) or ccw(c..) an arc to the next point about the centre after c; other vN are vias at no path point)
GND: C2.2 C3.2 C4.2 C5.2 C6.2 C7.1 C8.1 C9.2 C10.1 C11.1 C12.1 C13.1 C14.1 C15.2 C16.1 C17.2 C18.2 C19.2 C20.2 C21.2 C22.2 C23.1 C24.2 C25.1 C26.2 J1.5 J1.Shell J2.2 P1.2 R5.2 R6.1 R7.2 R14.2 R15.2 R16.1 RT1.2 U1.2 U2.3 U2.13 U3.17 U3.18 U3.33 U3.V U4.3 U4.4 U4.9 U4.10 U4.11 U4.21 U5.4 U5.12 U6.5 U6.6 U6.7 U6.8 U7.5 U7.8 U7.10 U8.4 X1.2 X1.4 | length 3356.5
  Top Layer w10: v1(1075,1650) U7.5@1115.51,1650 ; U7.5 U7.5@1115.51,1650 ; C12.1 1127,1809.68 1127,1743.01 1115,1731.01 1115,1650.51 U7.5@1115.51,1650 ; U7.8 1169.84,1649.84 1170,1650 U7.10 1198.9,1649.49 1224.14,1649.49 1230,1643.63 1230,1605.86 1235.86,1600 v1(1270,1600) ; R16.1@1370.16,2359.84 R16.1 1370.16,2360.16 1370.16,2522.84 U1.2 1371.34,2524.34 C26.2@1371.34,2600.55 ; RT1.2 1399.21,1599.21 1399.21,1565.79 v1(1400,1565) 1403.83,1561.17 1403.83,1545.86 R15.2 ; U3.33 1475.5,1884.5 1506.5,1853.5 1509.21,1850.79 U3.18 U3.17 1593.27,1831.1 1611.69,1812.68 C16.1@1635,1812.68 ; C5.2 1585,2205 1615,2175 v1(1615,2135) ; C10.1 1590,2110 v1(1615,2135) ; C11.1 1592.57,2155 1612.57,2135 v1(1615,2135) ; U4.4 1570.32,1539.68 U4.21 ; v2(1611.65,1541.65) 1590,1563.31 U4.3 1590,1707.72 R7.2 1628.83,1746.54 1768.46,1746.54 1790,1725 v1(1790,1610) 1790,1542.68 C18.2 ; v1(1635,1785) C16.1@1635,1812.68 ; C16.1 C16.1@1635,1812.68 ; U2.3 1687.44,2634.84 v2(1697.28,2625) ; U6.5@1680.15,1974.98 1699.84,1974.98 1699.84,1975.32 1700,1975.47 1757.8,1975.47 C25.1 ; C19.2 1696.34,1693.66 1738.66,1693.66 v1(1740,1695) ; U6.7 U6.8 ; v1(1760,1935) C25.1 ; C24.2 C25.1
  Top Layer w12: U4.10 U4.21@1550.63,1480.63 ; U4.9 1566.38,1500.31 v2(1568.35,1498.35) U4.21@1550.63,1480.63 ; R5.2@1540.98,1343.27 R5.2 1522.03,1344.25 1515,1351.28 1515,1391.02 1550.63,1426.65 U4.11 U4.21@1550.63,1480.63 ; R6.1@1579.02,1343.27 R6.1
  Top Layer w16: C12.1 C13.1 ; R5.2@1540.98,1343.27 R6.1@1579.02,1343.27 ; C23.1 1765,2124.16 1780,2139.16 v1(1780,2140)
  Bottom Layer w10: C14.1 1420,1844.29 1413.5,1850.79 1413.5,1853.5 1444.5,1853.5 1444.5,1884.5 1413.5,1884.5 U3.V@1413.5,1915.5 ; C15.2 1465,1842.64 1475.5,1853.14 U3.V@1475.5,1853.5 ; U3.V@1506.5,1853.5 U3.V@1475.5,1853.5 ; U3.V@1506.5,1946.5 1475.5,1946.5 1444.5,1946.5 1413.5,1946.5 U3.V@1413.5,1915.5 ; U5.12 1661.5,2352.2 C17.2 1699.14,2360 1705,2365.86 v1(1705,2410) C20.2 ; U3.V@1413.5,1915.5 1444.5,1915.5 1475.5,1915.5 1506.5,1915.5 1506.5,1884.5 1475.5,1884.5 U3.V@1475.5,1853.5
  other v1: 1378.5,2131.69 1441.5,2218.31
  other v2: 1611.65,1498.35 1568.35,1541.65 1697.28,2595.47 1697.28,2654.53
NetAE1_1: AE1.1 R2.2 | length 68.6
  Top Layer w20: AE1.1@1163.11,2500.71 AE1.1 1169.29,2494.53 R2.2
NetC1_1: C1.1 R16.2 R17.1 U1.5 | length 215
  Top Layer w10: U1.5 1408.54,2435.86 1408.54,2361.14 R16.2 1475.08,2360 1490,2374.92 C1.1 1490.35,2375.35 R17.1@1539.65,2375.35
NetC6_1: C6.1 C7.2 L3.1 R2.1 | length 182.1
  Top Layer w20: L3.1 C7.2 C6.1 R2.1
NetC8_2: C8.2 L3.2 L4.1 U3.1 | length 445.9
  Top Layer w12: L4.1 1144.29,2072.93 cw(c1161.36,2072.93) 1149.29,2085 1156.36,2092.07 ccw(c1123.43,2125) 1170,2125 ccw(c1219.99,2125) 1184.64,2089.65 1189.29,2085 cw(c1177.22,2072.93) 1194.29,2072.93 1194.29,1997.07 ccw(c1211.36,1997.07) 1199.29,1985 ccw(c1238.17,2023.87) 1238.17,1968.9 U3.1
  Top Layer w20: C8.2 L3.2
NetC12_2: C12.2 U3.4 X2.1 | length 375.2
  Top Layer w10: C12.2 1097.68,1870.68 X2.1 1110,1883 1110,1920 1120,1930 1250,1930 1270.16,1909.84 U3.4
NetC13_2: C13.2 U3.5 X2.2 | length 232.6
  Top Layer w10: C13.2 1212.32,1870.68 X2.2 1213,1890 1362.4,1890 U3.5
NetC15_1: C15.1 U3.12 | length 114.6
  Top Layer w10: v1@1450.15,1744.85 U3.12
  Bottom Layer w10: v1(1445,1735) v1@1447.5,1737.5 ; v1(1445,1735) 1462.07,1752.01 1462.07,1777.07 C15.1
NetC16_2: C16.2 R3.1 U3.19 | length 143.4
  Top Layer w10: U3.19 1617.64,1870.47 1635,1853.11 1635,1847.32 1636.18,1848.5 1683.82,1848.5 R3.1 R3.1@1683.68,1851
NetDS1_2: DS1.2 R15.1 | length 70.8
  Top Layer w12: DS1.2 R15.1
NetDS2_2: DS2.2 R12.1 | length 70.8
  Top Layer w12: DS2.2 R12.1
NetDS3_2: DS3.2 R13.1 | length 70.8
  Top Layer w12: DS3.2 R13.1
NetJ2_1: J2.1 U3.9 | length 662.2
  Top Layer w10: v1(1340,1735) 1340,1740.25 1391.09,1791.34 U3.9
  Bottom Layer w10: J2.1@1075,1365 1075,1410 1140,1475 1300,1475 1340,1515 v1(1340,1735)
NetJ2_3: J2.3 U7.9 | length 589.5
  Top Layer w10: J2.3@1075,1165 1038,1202 1038,1528 1065,1555 1175,1555 1190,1570 1190,1611.14 U7.9
NetJ2_4: J2.4 U7.6 | length 635.6
  Top Layer w10: J2.4@1075,1065 1025,1115 1025,1535 1058,1568 1100.05,1568 1130.47,1598.43 U7.6
NetJ_1: J.1 U3.13 | length 978.5
  Top Layer w10: v1(1450,1670) 1450,1690 1470,1710 1470,1770.16 ; 1469.85,1770.16 U3.13
  Bottom Layer w10: v1(1450,1670) 1455.41,1670 1465.41,1660 1615,1660 1790,1485 1790,1170 J.1
NetJ_2: J.2 U3.14 | length 828.3
  Top Layer w10: U3.14 1489.54,1744.54 1485,1740 1485,1711.5 1510,1686.5 v1(1510,1685)
  Bottom Layer w10: v1(1510,1685) 1610,1685 1805,1490 1805,1250 1860,1195 J.2
NetJ_3: J.3 U3.15 | length 701.8
  Top Layer w10: U3.15 1509.22,1775.78 1513,1772 v1(1513,1723.74)
  Bottom Layer w10: v1(1513,1723.74) 1513,1722 1535,1700 1615,1700 1820,1495 1820,1345 1865,1300 J.3
NetJ_4: J.4 U3.16 U7.2 | length 1170
  Top Layer w10: U7.2 1169.84,1729.84 v1(1195,1755) ; v1(1270,1640) 1510,1640 1555,1685 v1@1555,1720 ; U3.16 1529.43,1802.05 1529.43,1780.57 1548.79,1761.21 1548.79,1726.21 v1(1550,1725)
  Bottom Layer w10: v1(1195,1755) 1240,1755 1270,1725 v1(1270,1640) ; v1(1550,1725) 1610,1725 1835,1500 1835,1430 1865,1400 J.4
NetL1_1: L1.1 U2.2 | length 73.2
  Top Layer w12: L1.1 1588.66,2654.53 U2.2
NetL4_2: L4.2 U3.2 | length 265.3
  Top Layer w12: L4.2 1144.29,1989.14 ccw(c1178.43,1989.14) 1154.29,1965 ccw(c1192.41,2003.11) 1192.41,1949.21 U3.2
NetL_1: L.1 U1.3 | length 303.2
  Top Layer w10: U1.3 1335,2525.4 v1(1335,2600) ; L.1 v1(1505,2600)
  Bottom Layer w10: v1(1335,2600) v1(1505,2600)
NetR1_2: R1.2 R14.1 U3.6 | length 1085.7
  Top Layer w10: v1(1300,1670) v1(1405,1670) ; v1(1300,1760) 1275,1785 1275,1849.35 1296.12,1870.47 U3.6 ; R1.2 1692.19,1367.5 1747.5,1367.5 v1(1750,1370)
  Bottom Layer w10: v1(1300,1670) v1(1300,1760) ; v1(1405,1670) 1435,1640 1615,1640 1775,1480 1775,1395 v1(1750,1370) 1744.59,1370 1736.87,1362.28 R14.1
NetR4_2: R4.2 R7.1 U4.2 | length 131.7
  Top Layer w10: U4.2 1609.76,1600.79 1609.76,1692.05 R7.1 R4.2
NetR5_1: R5.1 U4.12 | length 79.4
  Top Layer w10: R5.1@1540,1380.75 1540,1394.14 1545.86,1400 1560,1400 1570.32,1410.32 U4.12
NetR6_2: R6.2 U4.13 | length 65.7
  Top Layer w10: R6.2 1590,1387.72 U4.13
NetR8_1: R8.1 U3.27 U5.2 | length 400.2
  Top Layer w10: U3.27 1489.54,2034.54 1535,2080 1600,2080 1615,2095 v1(1615,2096) ; R8.1 1695,2150.41 1705,2140.41 v1(1705,2135)
  Bottom Layer w10: v1(1615,2096) 1615.1,2096.1 1666.1,2096.1 v1(1705,2135) 1705,2140.41 1692.99,2152.42 U5.2
NetR9_1: R9.1 U3.26 U5.3 | length 346.2
  Top Layer w10: U3.26 1509.22,2034.22 1540,2065 1624.14,2065 1660,2100.86 R9.1
  Bottom Layer w10: v1(1660,2135) 1661.5,2136.5 U5.3
NetR10_2: R10.2 U3.8 U5.13 | length 1224.3
  Top Layer w10: v1(1298.74,1798.74) 1331.1,1831.1 U3.8
  Bottom Layer w10: v1(1298.74,1798.74) 1298.74,1801.69 1279,1821.43 1279,2235.77 1334.23,2291 1475.77,2291 1503.77,2263 1760.14,2263 1766,2268.86 1766,2331.43 1760.14,2337.28 R10.2 1712.28,2337.28 1692.99,2317.99 U5.13
NetR11_1: R11.1 U3.20 U4.6 | length 1004.1
  Top Layer w10: U4.6 1440.63,1559.37 1425,1575 1425,1621.14 1430.86,1627 1537,1627 1575,1665 1575,1750 1585,1760 1785,1760 1807,1782 1807,1863 1793,1877 1737,1877 1735,1875 ; U3.20 1644.84,1890.16 1658,1877 1733,1877 1735,1875 ; R11.1 1735,1875
NetR12_2: R12.2 U4.7 | length 134.3
  Top Layer w10: R12.2 1449.14,1475 1455,1480.86 1455,1520 1474.68,1539.68 U4.7
NetR13_2: R13.2 U4.8 | length 167.4
  Top Layer w10: R13.2 1455,1425 1470,1440 1470,1514.14 1475.86,1520 U4.8
NetRT1_1: RT1.1 U4.5 | length 103.2
  Top Layer w10: RT1.1@1447.4,1600.71 U4.5
NetU3_7: U3.7 U6.12 | length 1181.7
  Top Layer w10: v1(1302,1843.83) 1302,1844.93 1307.86,1850.79 U3.7 ; U6.12 1680.23,2040.1 1680.23,2057.34 1705,2082.11 v1(1705,2083.1)
  Bottom Layer w10: v1(1302,1843.83) 1298.32,1843.83 1292,1850.14 1292,2230.38 1339.62,2278 1470.38,2278 1498.38,2250 1744.14,2250 1750,2244.14 1750,2128.1 v1(1705,2083.1)
NetU3_10: U3.10 U7.1 | length 309.5
  Top Layer w10: U7.1 1189.53,1701.57 1192.95,1705 1355,1705 1375,1725 1375,1750 1385,1760 1400,1760 1410.78,1770.78 U3.10
NetU3_21: U3.21 U8.1 | length 1094.2
  Top Layer w10: U3.21 1650.16,1909.84 1670,1890 1798.38,1890 1820,1868.38 1820,1770.25 1815,1765.25 1815,1475.86 1809.14,1470 v1(1750,1470)
  Bottom Layer w10: U8.1 1465,1500 1495,1470 v1(1750,1470)
NetU3_22: U3.22 U6.3 U8.2 | length 1335
  Top Layer w10: U3.22 1650.47,1929.53 1660,1920 1714.14,1920 1720,1925.86 v1(1720,1945) ; v1(1625,1970) 1655.08,2000.08 U6.3@1659.57,2000.08 ; 1720,1925 1740,1905 1801.77,1905 1835,1871.77 1835,1460 1805,1430 v1(1750,1430)
  Bottom Layer w10: U8.2 1727.57,1450 1747.57,1430 v1(1750,1430) ; v1(1625,1970) 1695,1970 v1(1720,1945)
NetU3_23: U3.23 U6.4 U8.5 | length 1759.3
  Top Layer w10: U3.23 1598.24,1949.21 1604.46,1943 1642.17,1943 1654.57,1955.39 ; U6.4 1659.65,1980.47 1659.57,1980.39 1659.57,1980.06 1654.57,1975.06 1654.57,1955.39 ; v1(1680,1945) 1676.17,1948.83 1661.13,1948.83 1654.57,1955.39
  Bottom Layer w10: U8.5 1250,1350 1368,1468 1368,1704 1383,1719 1383,1762 1338,1807 1338,1872 1318,1892 1318,2219.62 1348.38,2250 1461.62,2250 1470,2241.62 1470,2080 1605,1945 v1(1680,1945)
NetU3_24: U3.24 U6.2 | length 123.6
  Top Layer w10: U3.24 1583.9,1968.9 1620,2005 1635,2005 1649.76,2019.76 1659.9,2019.76 U6.2
NetU3_25: U3.25 U6.1 U8.6 | length 1635
  Top Layer w10: U3.25 1528.91,2026.76 1537.16,2035 v1(1620,2035) 1624.61,2039.61 1659.9,2039.61 U6.1
  Bottom Layer w10: U8.6 1200.14,1400.14 1245.14,1400.14 1355,1510 1355,1710 1370,1725 1370,1750 1325,1795 1325,1865 1305,1885 1305,2225 1345,2265 1465,2265 1485,2245 1485,2085 1531.17,2038.83 1616.17,2038.83 v1(1620,2035)
NetU3_30: U3.30 X1.1 | length 138.8
  Top Layer w10: U3.30 1430.46,2058.38 1441.5,2069.41 X1.1
NetU3_31: U3.31 X1.3 | length 299.6
  Top Layer w10: X1.3 1378.5,2180.11 1372.65,2174.25 1349.65,2174.25 1340.87,2165.47 1340.87,2097.92 1349.65,2089.13 1385,2089.13 1410.78,2063.36 U3.31
V_1V8: C1.2 C4.1 C17.1 C20.1 L.2 R17.2 U5.11 | length 420
  Top Layer w10: R17.2@1539.96,2414.33 C1.2 C1.2 1490,2460.16 L.2 1517.48,2462.68 C4.1 1571.34,2461.34 1623.66,2461.34 v1(1625,2460)
  Bottom Layer w10: v1(1625,2460) 1626.34,2458.66 1626.34,2411.34 C20.1 1629.19,2408.48 1629.19,2361.52 C17.1 1630,2359.29 U5.11
V_3V3: C21.1 C22.1 C23.2 C24.1 C25.2 R8.2 R9.2 R10.1 U2.6 U5.9 U5.10 U6.9 U6.10 U7.3 U7.7 U8.8 | length 3142.7
  Top Layer w12: v1(1150,1770) 1150.08,1769.92 U7.3@1150.08,1688.46 ; U7.3@1150.08,1678.46 U7.3@1150.08,1688.46 ; U7.7 U7.3 U7.3@1150.08,1688.46 ; v1(1315,2305) 1335,2285 1695,2285 v1(1780,2370) 1810.03,2400.03 1810.03,2439.97 1720,2530 v1(1660,2530) 1659.94,2530.06 1659.94,2575.73 U2.6 ; R9.2 R8.2 1722.48,2217.72 1738.17,2202.03 1738.17,2057.68 ; U6.9 1752.8,2019.84 1760,2012.64 C25.2 C24.1 1805,2040 1796.16,2048.84 ; U6.10 1738.17,2057.68 ; v1(1785,2185) 1810,2160 1810,2062.68 1796.16,2048.84 ; 1738.17,2057.68 C23.2 1787.32,2057.68 1796.16,2048.84
  Bottom Layer w12: U8.8 1165,1500 1150,1515 v1(1150,1770) 1151.03,1770 1166.03,1785 1255,1785 1265,1795 1265,2255 v1(1315,2305) ; U5.9 C22.1@1567.01,2347.6 ; U5.10 1598.5,2316.1 C22.1@1567.01,2347.6 ; v1(1660,2530) 1659.76,2530 1570,2440.24 1570,2410.71 C21.1 1569.29,2352.72 C22.1 1566.57,2348.03 C22.1@1567.01,2347.6 ; R10.1 1741.36,2371.36 1778.64,2371.36 v1(1780,2370) 1785,2365 v1(1785,2185)
V_BAT: P1.1 R1.1 U4.14 U4.15 U4.16 | length 459.8
  Top Layer w12: U4.14 1609.69,1340.31 1620,1330 ; U4.15 1629.37,1390.63 1645,1375 1645,1360.32 1650.32,1355 1657.11,1361.8 1657.11,1375.08 1670.71,1388.68 U4.16
  Top Layer w16: P1.1@1620,1251.46 1620,1330 1625.32,1330 R1.1@1650.32,1355
V_MCU: C3.1 FB1.2 L1.2 U2.4 U2.5 | length 846.8
  Top Layer w12: FB1.2 1810,2255 1820,2265 v1(1820,2365) ; L1.2@1596.43,2592.68 1607.32,2581.79 C3.1 1610,2542.32 1610,2519.06 1629.06,2500 1690,2500 1774.66,2415.34 1774.66,2413.14 v1(1778.53,2409.27) ; U2.5 1597.32,2595.47 1617.01,2615.16 U2.4
  Bottom Layer w12: v1(1778.53,2409.27) 1778.53,2407.87 1820,2366.4 v1(1820,2365)
V_SYS: C2.1 C19.1 C26.1 U1.1 U1.4 U2.1 U2.8 U2.9 U2.10 U2.11 U2.12 U4.1 U4.20 | length 2634.7
  Top Layer w10: U1.4 1293,2437 1280,2450 1280,2619.14 1285.86,2625 1407.32,2625 ; U1.1 U1.1 1407.36,2599.96 C26.1 1407.32,2625 ; C2.1 1527.32,2630.86 1521.46,2625 1407.32,2625
  Top Layer w12: C2.1 1527.32,2687.32 1545,2705 1634.14,2705 1640,2699.14 ; U4.1 1629.37,1644.37 1642.68,1657.68 C19.1 ; U2.1 1645.86,2674.21 1640,2680.07 1640,2699.14 ; U4.20 1671.79,1560.45 1687.97,1560.45 1695,1567.48 C19.1 ; U2.8 1760.25,2595.47 ; U2.9 1762.44,2615.16 1767.28,2620 ; U2.10 1762.13,2634.84 1767.28,2640 ; U2.11 1761.81,2654.53 1767.28,2660 ; U2.12 1761.5,2674.21 1767.28,2680 ; v1(1740,1655) 1738.66,1656.34 1696.34,1656.34 C19.1 ; v1(1890,1655) v1(1890,1850) ; v1(1890,2135) 1890,2335 v1(1860,2365) 1860,2411.21 1760,2511.21 1760,2595.22 1760.25,2595.47 ; 1640,2699.14 1645.86,2705 1760.25,2705 1767.28,2697.97 1767.28,2680 ; 1760.25,2595.47 1767.28,2602.5 1767.28,2620 ; 1767.28,2620 1767.28,2640 ; 1767.28,2640 1767.28,2660 ; 1767.28,2660 1767.28,2680
  Bottom Layer w12: v1(1740,1655) v1(1890,1655) ; v1(1860,2365) v1@1865,2360 ; v1(1890,1850) v1(1890,2135)
V_USB: C18.1 DS1.1 DS2.1 DS3.1 J1.1 R4.1 U4.17 U4.18 U4.19 | length 1603.4
  Top Layer w10: U4.17 1709.69,1500.31 1720,1490
  Top Layer w12: DS1.1@1255.24,1525.24 DS1.1 DS2.1 DS3.1 1255.47,1335.47 1310,1280.94 v1@1310,1280 ; U4.18 1710,1520 1723.8,1533.8 C18.1@1746.47,1533.8 ; U4.19@1670.87,1539.84 C18.1@1748.01,1539.84
  Top Layer w16: J1.1 1283.82,1253.82 v1@1310,1280 ; R4.1 1764.46,1727.72 1771.49,1720.69 1771.49,1636.49 1752.68,1617.68 C18.1 1748.01,1535.34 1748.01,1518.01 1720,1490 1720,1415.86 1735.86,1400 1770,1400 1780,1390 1780,1354.59 1755.41,1330 v1(1750,1330)
  Bottom Layer w16: v1(1310.94,1280) 1490,1280 1540,1330 v1(1750,1330)
VDDR: C5.1 C9.1 C10.2 C11.2 C14.2 FB1.1 R3.2 R11.2 U3.11 U3.28 U3.29 U3.32 | length 2365.7
  Top Layer w10: 1330,2060 1320,2060 1295,2085 C9.1 1319.14,2107.68 1325,2113.54 1325,2240 1340,2255 FB1.1 1517.07,2251.36 1517.07,2230 ; 1330.57,2060 v1(1350,2060) 1375,2060 1391.09,2043.91 U3.32 ; v1(1406,1734.43) 1406,1735.14 1430.46,1759.61 U3.11 ; U3.29 1450.15,2040.15 1480,2070 1480,2145 1490,2155 C11.2 ; U3.28 1469.85,2039.85 1495,2065 1495,2104.14 1500.86,2110 C10.2 C11.2 ; R3.2 R11.2 1774.14,1810.31 1780,1816.17 1780,1849.09 v1(1779.54,1849.54) ; v1(1850,2135) 1850,2195 1808.46,2236.54 1641.54,2236.54 1635,2230 1517.07,2230 ; 1517.07,2230 1517.07,2208.64 C5.1 1524.19,2201.52 1524.19,2158.48 C11.2
  Bottom Layer w10: v1(1350,2060) 1351,2059 1351,1817.38 1388.38,1780 C14.2 1420,1752.01 1406,1738.01 v1(1406,1734.43) ; v1(1779.54,1849.54) 1850,1920 v1(1850,2135)
pads on no net: AE1.2 J1.2 J1.3 J1.4 J1.MH1 J1.MH2 U2.7 U3.3 U5.1 U5.5 U5.6 U5.7 U5.8 U5.14 U6.11 U7.4 U8.3 U8.7

## Polygon pours and split planes (outlines as drawn)
GND on Top Layer "Top Layer-GND" (solid, pour order 11): 1000,1000 1930,1000 1930,2725 1270,2725 1270,2370 1188,2370 1188,1979 1379,1979 1379,1935 1150,1935 1150,2370 1000,2370
GND on Bottom Layer "BTM_GND_POUR" (solid, remove dead copper, pour order 0): 1000,1000 1930,1000 1930,2725 1000,2725

## Text inside footprints (layer, text, board x,y; h text height)
FB1: Mechanical 6 "Land Pattern Adapted for Reflow Soldering" at 1500.63,2278.62 h1.97
J1: Mechanical 2 "PCB Edge" at 1283.82,980.08 h16
U1: Top Overlay "*" at 1424.4,2545.5 h50 r270; Mechanical 7 "0.024in/0.61mm" at 1193,2610.5 h25 r270; Mechanical 7 "0.075in/1.9mm" at 1357.5,2317 h25 r270; Mechanical 7 "0.037in/0.95mm" at 1376.2,2818 h25 r270; Mechanical 7 "0.114in/2.896mm" at 1357.5,2128.5 h25 r270; Mechanical 7 "0.11in/2.794mm" at 1597,2567.5 h25 r270; Mechanical 7 "0.063in/1.6mm" at 1522,2561.25 h25 r270; Mechanical 7 "Alt 2 Padstyle: OX90Y60D30P" at 873,2817.5 h50 r270; Mechanical 7 "Alt 1 Padstyle: OX60Y90D30P" at 933,2817.5 h50 r270; Mechanical 7 "Pin One Padstyle: RX52Y22D0TSM2" at 1053,2867.5 h50 r270; Mechanical 7 "Default Padstyle: RX52Y22D0TSM2" at 1113,2867.5 h50 r270; Mechanical 13 "*" at 1424.4,2545.5 h50 r270
U3: Top Overlay "*" at 1308.33,1968.74 h50; Mechanical 7 "Default Padstyle: RX11p02Y33p46D0T" at 1035,1541.73 h50; Mechanical 7 "Heat Tab Padstyle: RX135p83Y135p83D0T" at 997.5,1481.73 h50; Mechanical 7 "Via Padstyle: EX20Y20D10P" at 1147.5,1421.73 h50; Mechanical 7 "Alt 1 Padstyle: OX60Y90D30P" at 1122.5,1361.73 h50; Mechanical 7 "Alt 2 Padstyle: OX90Y60D30P" at 1122.5,1301.73 h50; Mechanical 7 "0.02in/0.5mm" at 1688.27,1946.56 h25; Mechanical 7 "0.195in/4.95mm" at 1372.5,2203.27 h25; Mechanical 7 "0.195in/4.95mm" at 1763.27,1887.5 h25; Mechanical 7 "0.203in/5.15mm" at 1031.73,1887.5 h25; Mechanical 7 "0.203in/5.15mm" at 1372.5,1621.73 h25; Mechanical 13 "*" at 1376.79,1953.74 h50
U5: Mechanical 7 "0.114in/2.896mm" at 1373,2141.25 h25 r270; Mechanical 7 "0.224in/5.69mm" at 1617.5,2406 h25 r270; Mechanical 7 "0.031in/0.8mm" at 1696.24,1901.5 h25 r270; Mechanical 7 "0.02in/0.508mm" at 1844.49,2100.5 h25 r270; Mechanical 7 "0.114in/2.896mm" at 1994.49,2141.25 h25 r270; Mechanical 7 "Alt 2 Padstyle: OX90Y60D30P" at 908,1897.5 h50 r270; Mechanical 7 "Alt 1 Padstyle: OX60Y90D30P" at 968,1897.5 h50 r270; Mechanical 7 "Default Padstyle: RX28Y10D0T" at 1148,1885 h50 r270
U7: Top Overlay "*" at 1189.37,1744.59 h50 r270; Mechanical 7 "0.083in/2.1mm" at 938.82,1731.25 h25 r270; Mechanical 7 "0.083in/2.1mm" at 1147.5,2008.68 h25 r270; Mechanical 7 "0.077in/1.95mm" at 1147.5,1403.82 h25 r270; Mechanical 7 "0.077in/1.95mm" at 1406.18,1737.5 h25 r270; Mechanical 7 "0.02in/0.5mm" at 1167.18,1478.82 h25 r270; Mechanical 7 "Alt 2 Padstyle: RX9p84Y22p83D10P" at 618.82,2050 h50 r270; Mechanical 7 "Alt 1 Padstyle: RX13p78Y24p8D10P" at 678.82,2050 h50 r270; Mechanical 7 "Default Padstyle: RX11p02Y37p4D0T" at 858.82,2062.5 h50 r270; Mechanical 13 "*" at 1174.37,1672.18 h50 r270
U8: Mechanical 7 "Default Padstyle: RX62Y22D0T" at 1655,1126 h50; Mechanical 7 "Pin One Padstyle: RX62Y22D0T" at 1655,1066 h50; Mechanical 7 "Alt 1 Padstyle: OX60Y90D30P" at 1642.5,886 h50; Mechanical 7 "Alt 2 Padstyle: OX90Y60D30P" at 1642.5,826 h50; Mechanical 7 "0.157in/3.988mm" at 1398.75,1619 h25; Mechanical 7 "0.244in/6.198mm" at 1398.75,1694 h25; Mechanical 7 "0.198in/5.029mm" at 1106.5,1412.5 h25; Mechanical 7 "0.05in/1.27mm" at 1692.5,1462.5 h25; Mechanical 7 "0.034in/0.864mm" at 1503.75,1206 h25; Mechanical 13 "*" at 1381,1471 h50; Bottom Overlay "*" at 1432.5,1517 h50